# Altium PCB Pack_BMS_Module.PcbDoc
Units mm, origin at the board's own origin, x right, y up, seen from the top; angles counter-clockwise.
Board outline 100 x 100 mm, 2 copper layers (Top Layer, Bottom Layer); 94 components, 63 nets, 274 pads, 5 vias.
Unrouted connection lines stored in the file: 173.
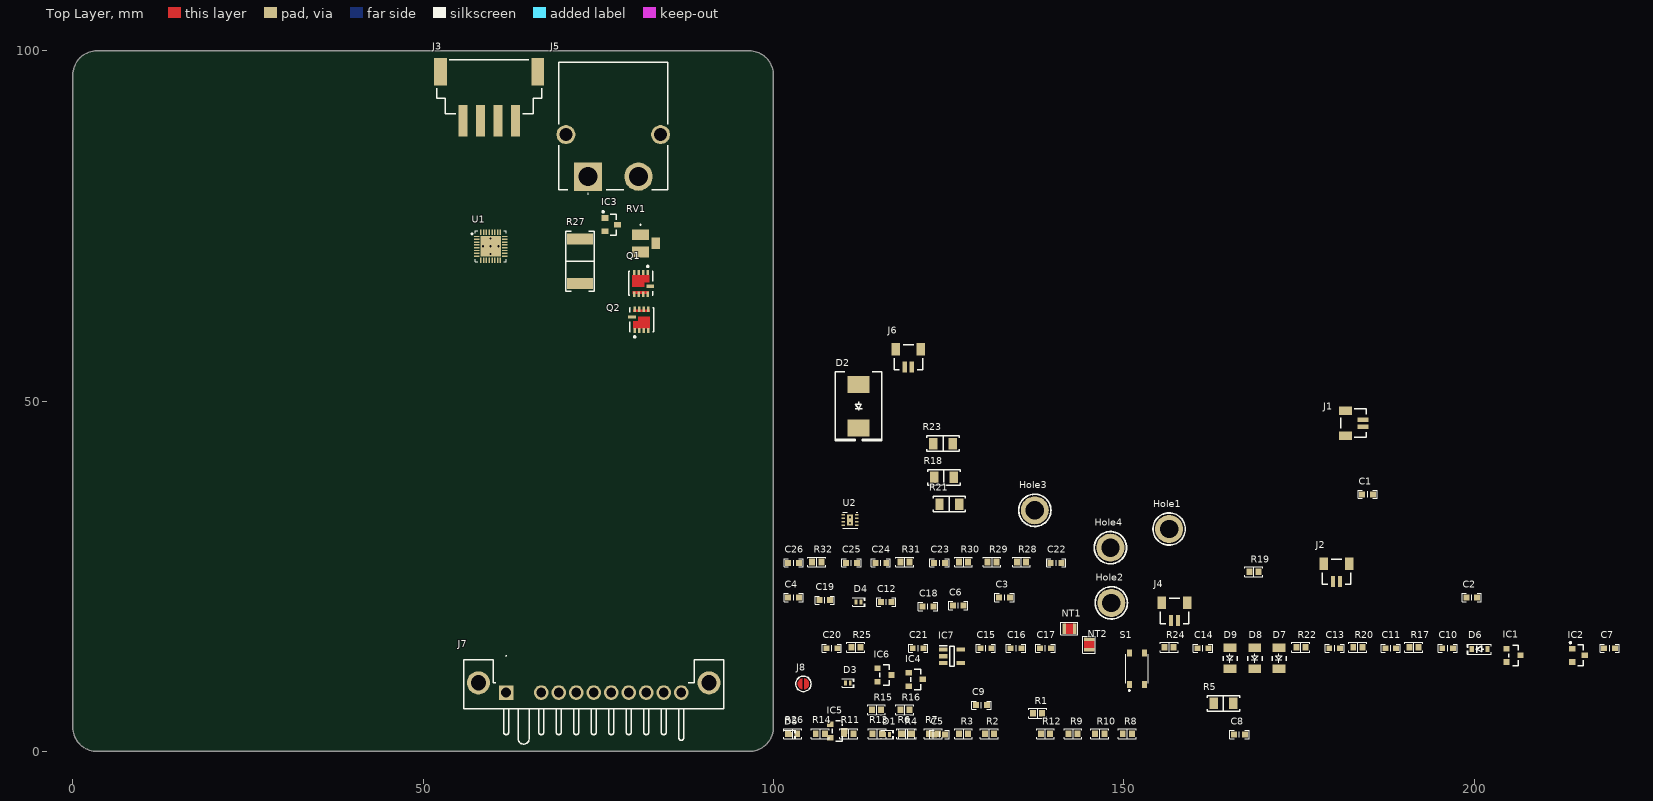
[diagram p0: Top Layer view]
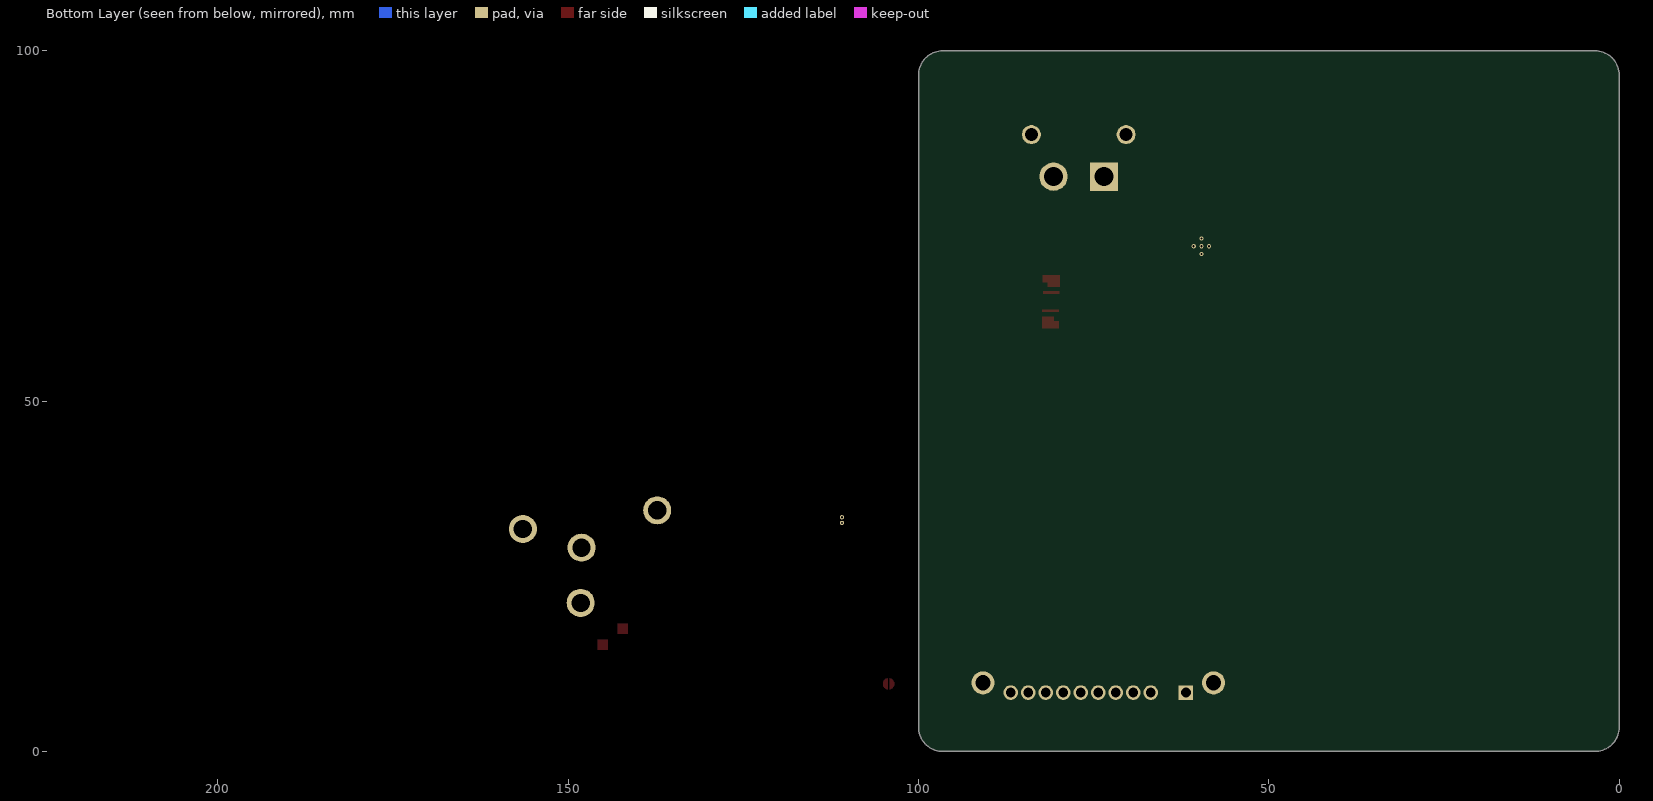
[diagram p1: Bottom Layer view, seen from below]

## Layer stack, top to bottom
Top Solder: solder mask 0.0102, Solder Resist, Dk 3.5
Top Layer: signal copper 0.0356
Dielectric 1: dielectric 0.32, FR-4, Dk 4.8
Bottom Layer: signal copper 0.0356
Bottom Solder: solder mask 0.0102, Solder Resist, Dk 3.5

## Board outline
0,3.479 0,96.521 cw(c3.479,96.521) 3.479,100 96.521,100 cw(c96.521,96.521) 100,96.521 100,3.479 cw(c96.521,3.479) 96.521,0 3.479,0 cw(c3.479,3.479)

## Design rules (kind name [scope] priority, off if disabled: settings)
BoardOutlineClearance [All] p1: gap=0.2 ignorepadtopadclearanceinfootprint=FALSE
Clearance "Stitching GND" [IsStitchingVia and InNet('GND') vs (IsVia and (Not IsStitchingVia)) Or IsPad] p1: gap=0.2 ignorepadtopadclearanceinfootprint=FALSE except(0.15: SMDPad-SMDPad; 0.28: Arc-Hole Track-Hole)
Clearance [All] p2: gap=0.2 ignorepadtopadclearanceinfootprint=FALSE except(0.15: SMDPad-SMDPad; 0.28: Arc-Hole Track-Hole)
HoleSize [All] p1: absolutevalues=TRUE maxlimit=6 minlimit=0.3 maxpercent=80.000 minpercent=20.000
HoleToHoleClearance HoleToHolePad [IsPad vs IsPad] p1: gap=0.45 allowstackedmicrovias=TRUE
HoleToHoleClearance HoleToHoleVia [IsVia vs IsVia] p2: gap=0.2 allowstackedmicrovias=TRUE
HoleToHoleClearance [All] p3: gap=0.3 allowstackedmicrovias=TRUE
MinimumAnnularRing MinimumViaAnnularRing [IsVia] p1: minimumring=0.15
MinimumAnnularRing [All] p2: minimumring=0.254
MinimumSolderMaskSliver [All] p1: minsoldermaskwidth=0.1
PlaneConnect [All] p1: planeconnectstyle=Relief reliefexpansion=0.508 reliefentries=4 reliefconductorwidth=0.32 reliefairgap=0.254
PolygonConnect MolexPwrGND [InNet('GND') vs IsPad And HasFootprint('43045-08YY_121314')] p1: connectstyle=Relief reliefconductorwidth=1 reliefentries=4 polygonreliefangle="90 Angle" conductorbypadedge=TRUE mindistance=0.381 enablemindistance=FALSE airgapwidth=0.35
PolygonConnect DRVTherrmalGND [InNet('GND') vs IsPad And HasFootprint('RXZ0016A-MFG')] p2: connectstyle=Direct reliefconductorwidth=0.254 reliefentries=4 polygonreliefangle="90 Angle" airgapwidth=0.254
PolygonConnect GNDStitchingDirect [InNet('GND')] p3: thpad.connectstyle=Relief thpad.reliefconductorwidth=0.32 thpad.reliefentries=4 thpad.polygonreliefangle="90 Angle" thpad.airgapwidth=0.254 thpad.conductorbypadedge=TRUE thpad.mindistance=0.381 thpad.enablemindistance=FALSE smdpad.connectstyle=Relief smdpad.reliefconductorwidth=0.32 smdpad.reliefentries=4 smdpad.polygonreliefangle="90 Angle" smdpad.airgapwidth=0.254 smdpad.conductorbypadedge=TRUE smdpad.mindistance=0.381 smdpad.enablemindistance=FALSE via.connectstyle=Direct via.reliefconductorwidth=0.254 via.reliefentries=4 via.polygonreliefangle="90 Angle" via.airgapwidth=0.254
PolygonConnect [All] p4: connectstyle=Relief reliefconductorwidth=0.32 reliefentries=4 polygonreliefangle="90 Angle" conductorbypadedge=TRUE mindistance=0.381 enablemindistance=FALSE airgapwidth=0.254
RoutingVias PowerVias [InNetClass('POWER') or InNet('GND')] p1: holewidth=0.5 width=0.8 viastyle="Through Hole" minholewidth=0.3 minwidth=0.6 maxholewidth=1.2 maxwidth=1.6
RoutingVias SignalVias [All] p2: holewidth=0.3 width=0.6 viastyle="Through Hole" minholewidth=0.3 minwidth=0.6 maxholewidth=0.5 maxwidth=0.8
SilkToSilkClearance [All] p1: silktosilkclearance=0.1
SilkToSolderMaskClearance [IsPad] p1: minsilkscreentomaskgap=0.1 clearancetoexposedcopper=TRUE
SolderMaskExpansion [All] p1: expansion=0.05 istentingtop=FALSE
SupplyNets "Schematic Supply Nets_5" [InNet('PACK+')] p1: voltage=12.60
SupplyNets "Schematic Supply Nets_4" [InNet('+3V3_LED')] p2: voltage=3.300
SupplyNets "Schematic Supply Nets_3" [InNet('GND')] p3: voltage=0.000
SupplyNets "Schematic Supply Nets_1" [InNet('PACK-')] p4: voltage=0.000
Width WidthPower [InNetClass('POWER') or InNet('GND')] p1: maxlimit=3 minlimit=0.2 preferedwidth=0.6
Width WidthSignal [All] p2: maxlimit=1 minlimit=0.2 preferedwidth=0.3
24 further rules are at their usual default settings.

## Classes and differential pairs
component class Pack_BMS_Module: Hole1 Hole2 Hole3 Hole4
net class TS[1..4]: TS1 TS2 TS3 TS4
component class SEC_PROT: C22 C23 C24 C25 C26 R28 R29 R30 R31 R32 U2
component class BATT_MGMT: C7 C8 C9 C10 C11 C12 C13 C14 C15 C16 C17 C18 C19 C20 C21 D6 D7 D8 D9 IC1 IC2 IC3 IC4 IC5 IC6 IC7 J8 NT1 NT2 Q1 Q2 R5 R6 R7 R8 R9 R10 R11 R12 R13 R15 R16 R17 R18 R19 R20 R21 R22 R23 R24 R25 R26 R27 RV1 S1 U1
component class BATT_CONN: C5 C6 D1 D2 D3 D4 D5 J7 R1 R2 R3 R4
component class CELL_CONN: C1 C2 C3 C4 J1 J2 J3 J4 J5 J6

## Components (designator, comment, footprint, x,y, rotation, side; value= is the part's Value field where it differs from the comment)
C1 "100nF" CAP_SMD_603 184.785,36.703 r0 top
C2 "100nF" CAP_SMD_603 199.644,21.971 r0 top
C3 "100nF" CAP_SMD_603 132.969,21.971 r0 top
C4 "100nF" CAP_SMD_603 102.87,21.971 r0 top
C5 "100nF" CAP_SMD_603 123.698,2.413 r0 top
C6 "100nF" CAP_SMD_603 126.365,20.828 r0 top
C7 "100nF" CAP_SMD_603 219.329,14.732 r0 top
C8 "100nF" CAP_SMD_603 166.497,2.413 r0 top
C9 "100nF" CAP_SMD_603 129.68,6.604 r0 top
C10 "1uF" CAP_SMD_603 196.215,14.732 r0 top
C11 "100nF" CAP_SMD_603 188.087,14.732 r0 top
C12 "1uF" CAP_SMD_603 116.091,21.336 r0 top
C13 "100nF" CAP_SMD_603 180.086,14.732 r0 top
C14 "100nF" CAP_SMD_603 161.29,14.732 r0 top
C15 "100nF" CAP_SMD_603 130.302,14.732 r0 top
C16 "1uF" CAP_SMD_603 134.62,14.732 r0 top
C17 "1uF" CAP_SMD_603 138.811,14.732 r0 top
C18 "100nF" CAP_SMD_603 122.047,20.701 r0 top
C19 "100nF" CAP_SMD_603 107.315,21.59 r0 top
C20 "100nF" CAP_SMD_603 108.331,14.732 r0 top
C21 "100nF" CAP_SMD_603 120.65,14.732 r0 top
C22 "100nF" CAP_SMD_603 140.335,26.924 r0 top
C23 "100nF" CAP_SMD_603 123.698,26.924 r0 top
C24 "470nF" CAP_SMD_603 115.316,26.924 r0 top
C25 "100nF" CAP_SMD_603 111.125,26.924 r0 top
C26 "100nF" CAP_SMD_603 102.87,26.924 r0 top
D1 "TPD1E10B06DPYR" 0402 116.205,2.413 r0 top
D2 "SMDJ13A" "DO214AB SMC" 112.141,49.276 r270 top
D3 "TPD1E10B06DPYR" 0402 110.617,9.779 r0 top
D4 "TPD1E10B06DPYR" 0402 112.141,21.336 r0 top
D5 "TPD1E10B06DPYR" 0402 102.235,2.413 r0 top
D6 "BAT54HT1G" "SOD323 IPC" 200.787,14.605 r0 top
D7 "LED" LED_1206 172.085,13.335 r90 top
D8 "LED" LED_1206 168.656,13.335 r90 top
D9 "LED" LED_1206 165.1,13.335 r90 top
Hole1 "Hole" hole_2.6 156.464,31.75 r0 top
Hole2 "Hole" hole_2.6 148.209,21.209 r0 top
Hole3 "Hole" hole_2.6 137.287,34.417 r0 top
Hole4 "Hole" hole_2.6 148.082,29.083 r0 top
IC1 "FDN358P" "ON SEMI SOT-23-3" 205.613,13.716 r0 top
IC2 "IRLML6344TRPBF" "INFINEON SOT-23-3" 214.884,13.716 r0 top
IC3 "IRLML6344TRPBF" "INFINEON SOT-23-3" 76.835,75.184 r0 top
IC4 "DMN1019USN-7" "DIODES SOT-23-3" 120.285,10.287 r0 top
IC5 "DMN1019USN-7" "DIODES SOT-23-3" 109.093,2.921 r0 top
IC6 "DMN1019USN-7" "DIODES SOT-23-3" 115.84,10.922 r0 top
IC7 "TPS70933DBVR" SOT95P280X145-5N 125.476,13.589 r0 top
J1 "BM02B-SRSS-TB(LF)(SN)" "JST BM02B-SRSS-TB" 182.888,46.855 r90 top
J2 "BM02B-SRSS-TB(LF)(SN)" "JST BM02B-SRSS-TB" 180.34,25.527 r0 top
J3 "S4B-XH-SM4-TB(LF)(SN)" "JST XH S4B-XH-SM4-TB" 59.436,94.742 r180 top
J4 "BM02B-SRSS-TB(LF)(SN)" "JST BM02B-SRSS-TB" 157.226,19.939 r0 top
J5 "XT60PW-M" XT60PWM 73.533,82.042 r0 top
J6 "BM02B-SRSS-TB(LF)(SN)" "JST BM02B-SRSS-TB" 119.245,56.126 r0 top
J7 "1746092-1" 17460921 61.849,8.4 r0 top
J8 "Jumper Pad" "Jumper Pad" 104.267,9.652 r0 top
NT1 "Net_Tie" Net_Tie_1.5mm 142.228,17.526 r0 top net-tie
NT2 "Net_Tie" Net_Tie_1.5mm 145.034,15.24 r90 top net-tie
Q1 "IQEH54NE2LM7UCG" IFX-PG-TTFN-9-1-V 81.269,66.806 r270 top
Q2 "IQEH54NE2LM7UCG" IFX-PG-TTFN-9-1-V 80.982,61.591 r90 top
R1 "100R" "RES 0603_1608" 137.694,5.461 r0 top
R2 "100R" "RES 0603_1608" 130.81,2.54 r0 top
R3 "47R" "RES 0603_1608" 127.127,2.54 r0 top
R4 "47R" "RES 0603_1608" 119.126,2.54 r0 top
R5 "300R" "RES 1206_3216" 164.211,6.858 r0 top
R6 "10M" "RES 0603_1608" 118.872,2.54 r0 top
R7 "10M" "RES 0603_1608" 122.809,2.54 r0 top
R8 "10M" "RES 0603_1608" 150.495,2.54 r0 top
R9 "10k" "RES 0603_1608" 142.748,2.54 r0 top
R10 "10k" "RES 0603_1608" 146.558,2.54 r0 top
R11 "5.1k" "RES 0603_1608" 110.744,2.54 r0 top
R12 "5.1k" "RES 0603_1608" 138.811,2.54 r0 top
R13 "5.1k" "RES 0603_1608" 114.808,2.54 r0 top
R14 "51k" "RES 0603_1608" 106.68,2.54 r0 top
R15 "1k" "RES 0603_1608" 114.707,5.969 r0 top
R16 "1k" "RES 0603_1608" 118.745,5.969 r0 top
R17 "1k" "RES 0603_1608" 191.389,14.859 r0 top
R18 "50R" "RES 1206_3216" 124.333,39.116 r0 top
R19 "100R" "RES 0603_1608" 168.555,25.654 r0 top
R20 "1k" "RES 0603_1608" 183.388,14.859 r0 top
R21 "50R" "RES 1206_3216" 125.095,35.306 r0 top
R22 "1k" "RES 0603_1608" 175.26,14.859 r0 top
R23 "50R" "RES 1206_3216" 124.206,43.942 r0 top
R24 "1k" "RES 0603_1608" 156.464,14.859 r0 top
R25 "100R" "RES 0603_1608" 111.76,14.859 r0 top
R26 "100R" "RES 0603_1608" 102.743,2.54 r0 top
R27 "1 mOhms" "RES 2512_6432" 72.39,69.977 r270 top
R28 "100R" "RES 0603_1608" 135.382,27.051 r0 top
R29 "1k" "RES 0603_1608" 131.191,27.051 r0 top
R30 "5.1R" "RES 0603_1608" 127.127,27.051 r0 top
R31 "1k" "RES 0603_1608" 118.745,27.051 r0 top
R32 "1k" "RES 0603_1608" 106.172,27.051 r0 top
RV1 "ITV4030L1215" ITV4030L1215 81.81,72.517 r180 top
S1 "PTS815_SJK_250_SMTR_LFS" PTS815SJK250SMTRLFS 151.892,11.811 r90 top
U1 "BQ41Z50RSNT" QFN32_RSN_TEX 59.636,72.095 r0 top
U2 "BQ296100DSGR" DSG0008A 110.932,33.024 r0 top

## Footprints (in the part's own frame and the unit in brackets; to place one, negate y for a bottom-side part, rotate by r counter-clockwise, add the part's x,y. Pads: shape width x height; smd on the part's side, far side on the other; paste and mask are expansions set on the pad)
0402 [mm] "SODFL, 2-Leads, Body 0.675x1.075mm, IPC Medium Density"
  rect 0.4x0.7 smd: 1(-0.35,0) 2(0.35,0)
  silkscreen extent -0.8,-0.63 0.92,0.63, body extent -0.51,-0.31 0.5,0.3, height 0.45
17460921 [mm]
  rect 2.1x2.1 hole 1.4: 1(0,0)
  round 2.1 hole 1.4: 2(5,0) 3(7.5,0) 4(10,0) 5(12.5,0) 6(15,0) 7(17.5,0) 8(20,0) 9(22.5,0) 10(25,0)
  round 3.3 hole 2.2: 11(-3.95,1.4) 12(28.95,1.4)
  silkscreen extent -6.05,-7.35 31.05,5.3, body extent -6.05,-7.35 31.05,4.7, height 4.79
CAP_SMD_603 [mm]
  rect 0.85x0.85 smd: 1(-0.775,0) 2(0.775,0)
  silkscreen extent -1.37,-0.59 1.37,0.59, body extent -0.8,-0.4 0.8,0.4, height 0.9
"DIODES SOT-23-3" [mm] "SOT23, 3-Leads, Body 2.90x2.40mm, Pitch 0.95mm, IPC Medium Density"
  rect 0.9x0.8 smd: 1(-1,0.95) 2(-1,-0.95) 3(1,0)
  silkscreen extent -0.7,-1.45 0.7,1.45, body extent -1.41,-1.45 1.41,1.45, height 1.5
"DO214AB SMC" [mm] "Molded Diode, 2-Leads, Body 6.85x5.90mm, IPC Medium Density"
  rect 2.45x3.15 smd: 1(-3.1,0) 2(3.1,0)
  silkscreen extent -4.9,-3.3 4.9,3.3, body extent -3.97,-2.95 3.97,2.95, height 2.6
DSG0008A [mm]
  rect 0.5x0.25 smd paste+0 mask+0.051: 1(-0.95,0.75) 2(-0.95,0.25) 3(-0.95,-0.25) 4(-0.95,-0.75) 5(0.95,-0.75) 6(0.95,-0.25) 7(0.95,0.25) 8(0.95,0.75)
  rect 0.9x1.6 smd paste-0.45 mask+0.051: 9(0,0)
  round 0.6 hole 0.3 paste-2539.97 mask+0.076: V(0,-0.4) V(0,0.4)
  silkscreen extent -1.07,-1.15 1.07,1.15, body extent -1,-1 1,1, height 0.77
hole_2.6 [mm] "2.6mm hole with exposed ring"
  round 4 hole 2.6: 1(0,0)
  silkscreen extent -2.3,-2.3 2.3,2.3
IFX-PG-TTFN-9-1-V [mm] "TTFN-9-1, 0.65 mm pitch, 9 pin, 3.30mm L X 3.30mm W X 1.10mm H body"
  rect 0.71x0.35 smd paste-0.35 mask+0: 1(-1.528,0.787) 1(-1.528,0.138) 1(-1.528,-1.162) 1(-1.528,-0.513)
  rect 0.8x0.35 smd paste-0.4 mask+0: 2(1.528,0.787) 2(1.528,0.138) 2(1.528,-1.162) 2(1.528,-0.513)
  rect 0.45x1.1 smd paste-0.55 mask+0: 3(0.423,1.162)
  Top Layer region: 0.477,-1.392 -1.172,-1.392 -1.172,1.017 -0.188,1.017 -0.188,0.288 0.477,0.288
  Top Layer region: 1.128,0.963 1.478,0.963 1.478,-1.337 1.128,-1.337
  silkscreen extent -2.55,-1.9 1.7,1.5, body extent -1.62,-1.84 1.68,1.46, height 1.11
"INFINEON SOT-23-3" [mm] "SOT23, 3-Leads, Body 2.90x2.40mm, Pitch 0.95mm, IPC Medium Density"
  rect 0.972x0.802 smd: 1(-0.885,0.95) 2(-0.885,-0.95) 3(0.885,0)
  silkscreen extent -1.27,-1.5 0.7,1.95, body extent -1.16,-1.45 1.16,1.45, height 1
ITV4030L1215 [mm]
  rect 2.4x1.55 smd: 1(0.775,-1.225) 3(0.775,1.225)
  rect 1.2x1.6 smd: 2(-1.375,0)
  silkscreen extent 0.75,-2.7 0.85,-2.6, body extent -2,-1.85 2,1.85, height 1
"JST BM02B-SRSS-TB" [mm] "1.0mm pitch/Disconnectable Crimp style connector"
  rect 0.6x1.55 smd: 1(-0.5,-1.262) 2(0.5,-1.262)
  rect 1.2x1.8 smd: M(-1.8,1.262) M(1.8,1.262)
  silkscreen extent -2.03,-1.68 2.03,1.91, body extent -2,-1.69 2,1.91, height 4.32
"JST XH S4B-XH-SM4-TB" [mm] "CONN HEADER SMD R/A 4POS 2.5MM"
  rect 1.3x4.5 smd: 1(-3.75,4.75) 2(-1.25,4.75) 3(1.25,4.75) 4(3.75,4.75)
  rect 1.8x3.9 smd: M(-6.95,-2.25) M(6.95,-2.25)
  silkscreen extent -7.5,-4 7.5,3.75, body extent -7.47,-4 7.48,6, height 6
"Jumper Pad" [mil]
  round 1 smd: 1(-18.48,0) 2(18.48,0)
  Top Layer region: 5.47,-31.02 5.47,31.02 18.81,25.26 28.15,14.14 31.5,0 28.15,-14.14 18.81,-25.26 5.47,-31.02
  Top Layer region: -5.47,-31.02 -18.81,-25.26 -28.15,-14.14 -31.5,0 -28.15,14.14 -18.81,25.26 -5.47,31.02 -5.47,31.02
  silkscreen extent -43,-43 43,43
LED_1206 [mm]
  rect 1.2x1.8 smd: 1(1.473,-0.051) 2(-1.549,-0.051)
  silkscreen extent -0.7,-1.09 0.6,0.94, body extent -1.57,-0.86 1.63,0.74, height 1.11
Net_Tie_1.5mm [mm] "Net Tie, via style. Full via, 0.3 hole, 0.6 diameter."
  rect 0.5x1.5 smd paste-2539.97 mask+0.102: 1(-0.75,0) 2(0.75,0)
  Top Layer region: -0.75,-0.75 0.75,-0.75 0.75,0.75 -0.75,0.75
  silkscreen extent -1.2,-0.9 1.2,0.9
"ON SEMI SOT-23-3" [mm] "SOT23, 3-Leads, Body 2.90x2.40mm, Pitch 0.95mm, IPC Medium Density"
  rect 0.9x0.8 smd: 1(-1,0.95) 2(-1,-0.95) 3(1,0)
  silkscreen extent -0.7,-1.45 0.7,1.45, body extent -1.16,-1.45 1.16,1.45, height 1
PTS815SJK250SMTRLFS [mm]
  rect 1x0.7 smd: 1(-2.25,1.075) 1(2.25,1.075) 2(-2.25,-1.075) 2(2.25,-1.075)
  silkscreen extent -3.2,-1.6 2.07,1.6, body extent -2.3,-1.6 2.3,1.6, height 2.5
QFN32_RSN_TEX [mil]
  rect 29.81x8.03 smd: 1(-78.41,55.12) 2(-78.41,39.38) 3(-78.41,23.62) 4(-78.41,7.88) 5(-78.41,-7.88) 6(-78.41,-23.62) 7(-78.41,-39.38) 8(-78.41,-55.12) 17(78.41,-55.12) 18(78.41,-39.38) 19(78.41,-23.62) 20(78.41,-7.88) 21(78.41,7.88) 22(78.41,23.62) 23(78.41,39.38) 24(78.41,55.12)
  rect 8.03x29.81 smd: 9(-55.12,-78.41) 10(-39.38,-78.41) 11(-23.62,-78.41) 12(-7.88,-78.41) 13(7.88,-78.41) 14(23.62,-78.41) 15(39.38,-78.41) 16(55.12,-78.41) 25(55.12,78.41) 26(39.38,78.41) 27(23.62,78.41) 28(7.88,78.41) 29(-7.88,78.41) 30(-23.62,78.41) 31(-39.38,78.41) 32(-55.12,78.41)
  rect 114x114 smd: 33(0,0)
  silkscreen extent -109,-86 86,86, body extent -79,-79 79,79, height 31
"RES 0603_1608" [mm] "Chip Resistor, 2-Leads, Body 1.60x0.80mm, IPC Medium Density"
  rect 0.85x0.95 smd: 1(-0.65,0) 2(0.65,0)
  silkscreen extent -1.27,-0.7 1.27,0.7, body extent -0.8,-0.4 0.8,0.4, height 0.45
"RES 1206_3216" [mm] "Chip Resistor, 2-Leads, Body 3.13x1.55mm, IPC Medium Density"
  rect 1.2x1.65 smd: 1(-1.4,0) 2(1.4,0)
  silkscreen extent -2.3,-1.1 2.3,1.1, body extent -1.6,-0.8 1.6,0.8, height 0.6
"RES 2512_6432" [mm] "Chip Resistor, 2-Leads, Body 6.30x3.15mm, IPC Medium Density"
  rect 1.6x3.65 smd: 1(-3.175,0) 2(3.175,0)
  silkscreen extent -4.3,-2.05 4.3,2.05, body extent -3.15,-1.57 3.15,1.57, height 0.7
"SOD323 IPC" [mm] "SOD, 2-Leads, Body 1.25x2.50mm, IPC Medium Density"
  rect 0.625x0.83 smd: 1(-1.112,0) 2(1.112,0)
  silkscreen extent -1.78,-0.7 1.68,0.7, body extent -1.36,-0.62 1.36,0.63, height 1.05
SOT95P280X145-5N [mm]
  rect 1.2x0.6 smd: 1(-1.25,0.95) 2(-1.25,0) 3(-1.25,-0.95) 4(1.25,-0.95) 5(1.25,0.95)
  silkscreen extent -1.85,-1.45 0.3,1.5, body extent -1.4,-1.45 1.4,1.45, height 1.2
XT60PWM [mm]
  rect 4.05x4.05 hole 2.7: 1(0,0)
  round 4.05 hole 2.7: 2(7.2,0)
  round 2.7 hole 1.8: 3(-3.15,6) 3(10.35,6)
  silkscreen extent -4.15,-2.5 11.35,16.35, body extent -4.35,-1.82 11.55,16.38, height 8.61

## Part data
C1 C2 C3 C4 C5 C6 C7 C8 C9 C10 C11 C12 C13 C14 C15 C16 C17 C18 C19 C20 C21 C22 C23 C24 C25 C26: library part "Non-polar Capacitor", "Generic Ceramic Capacitor", Voltage=25V
D1 D3 D4 D5: "TVS DIODE 5.5VWM 14VC 2X1SON", Current - Peak Pulse (10/1000µs)="5A (8/20µs)", Device Package="0402 (1005 Metric)", Manufacturer="Texas Instruments", Operating Temperature="-40°C ~ 125°C (TA)", Power - Peak Pulse=90W, Power Line Protection=No, Supplier Device Package="2-X1SON (1x.60)", Supplier Part Number 1=296-30406-1-ND, Voltage - Breakdown (Min)=6V, Voltage - Clamping (Max) @ Ipp=14V, Voltage - Reverse Standoff (Typ)="5.5V (Max)", Applications="General Purpose", Bidirectional Channels=1, ComponentLink1Description=Datasheet, ComponentLink1URL=http://www.ti.com/general/docs/suppproductinfo.tsp?distId=10&gotoUrl=http%3A%2F%2Fwww.ti.com%2Flit%2Fgpn%2Ftpd1e10b06, ComponentLink2Description="DigiKey Link", ComponentLink2URL=https://www.digikey.com/en/products/detail/texas-instruments/TPD1E10B06DPYR/3197744, LastUpdated="6/3/2024 8:23:00 PM", Lifecycle Status=Active, Minimum Order=1, Mounting Type="Surface Mount", Package / Case="0402 (1005 Metric)", Packaging=TapeAndReel, Part Number=TPD1E10B06DPYR, Part Status=Active, PartId=10446, Price=0.06, Series=-, Supplier 1=DigiKey, Type=Zener
D2: "TVS DIODE 13VWM 21.5VC DO214AB", Current - Peak Pulse (10/1000µs)=139.5A, Manufacturer="Littelfuse Inc.", Operating Temperature="-65°C ~ 150°C (TJ)", Package / Case="DO-214AB, SMC", Power - Peak Pulse="3000W (3kW)", Power Line Protection=No, Supplier Device Package="DO-214AB (SMCJ)", Supplier Part Number 1=SMDJ13ACT-ND, Voltage - Breakdown (Min)=14.4V, Voltage - Clamping (Max) @ Ipp=21.5V, Voltage - Reverse Standoff (Typ)=13V, Applications="General Purpose", ComponentLink1Description=Datasheet, ComponentLink1URL=https://www.littelfuse.com/~/media/electronics/datasheets/tvs_diodes/littelfuse_tvs_diode_smdj_datasheet.pdf.pdf, ComponentLink2Description="DigiKey Link", ComponentLink2URL=https://www.digikey.com/en/products/detail/littelfuse-inc/SMDJ13A/2024476, LastUpdated="6/3/2024 7:57:02 PM", Lifecycle Status=Active, Minimum Order=1, Mounting Type="Surface Mount", Packaging=TapeAndReel, Part Number=SMDJ13A, Part Status=Active, PartId=6478, Price=0.33, Series=SMDJ, Supplier 1=DigiKey, Type=Zener, Unidirectional Channels=1
D6: "DIODE SCHOTTKY 30V 200MA SOD323", Capacitance @ Vr, F="10pF @ 1V, 1MHz", Current - Average Rectified (Io)="200mA (DC)", Current - Reverse Leakage @ Vr="2µA @ 25V", Manufacturer="ON Semiconductor", Operating Temperature - Junction="-55°C ~ 150°C", Package / Case="SC-76, SOD-323", Supplier Device Package=SOD-323, Supplier Part Number 1=BAT54HT1GOSCT-ND, Voltage - DC Reverse (Vr) (Max)=30V, Voltage - Forward (Vf) (Max) @ If="800mV @ 100mA", ComponentLink1Description=Datasheet, ComponentLink1URL=//media.digikey.com/pdf/Data%20Sheets/Fairchild%20PDFs/BAT54HT1G_Rev_1.2.pdf, ComponentLink2Description="DigiKey Link", ComponentLink2URL=http://digikey.com/product-detail/en/on-semiconductor/BAT54HT1G/BAT54HT1GOSCT-ND/917809, Diode Type=Schottky, LastUpdated="10/27/2025 1:55:15 PM", Lifecycle Status=Active, Minimum Order=1, Mounting Type="Surface Mount", Packaging=TapeAndReel, Part Number=BAT54HT1G, Part Status=Active, PartId=3080, Price=0.03, Reverse Recovery Time (trr)=5ns, Speed="Small Signal =< 200mA (Io), Any Speed", Supplier 1=DigiKey
D7 D8 D9: "Indicator LED", Color=Blue
IC1: "MOSFET P-CH 30V 1.5A SSOT3", Current - Continuous Drain (Id) @ 25°C="1.5A (Ta)", Drain to Source Voltage (Vdss)=30V, Drive Voltage (Max Rds On,  Min Rds On)="4.5V, 10V", Input Capacitance (Ciss) (Max) @ Vds="182pF @ 15V", Manufacturer="ON Semiconductor", Operating Temperature="-55°C ~ 150°C (TJ)", Package / Case="TO-236-3, SC-59, SOT-23-3", Power Dissipation (Max)="500mW (Ta)", Supplier Device Package=SuperSOT-3, Supplier Part Number 1=FDN358PCT-ND, ComponentLink1Description=Datasheet, ComponentLink1URL=https://www.onsemi.com/pub/Collateral/FDN358P-D.PDF, ComponentLink2Description="DigiKey Link", ComponentLink2URL=http://digikey.com/product-detail/en/on-semiconductor/FDN358P/FDN358PCT-ND/965606, FET Type=P-Channel, Gate Charge (Qg) (Max) @ Vgs="5.6nC @ 10V", LastUpdated="6/3/2024 8:15:27 PM", Lifecycle Status=Active, Minimum Order=1, Mounting Type="Surface Mount", Packaging=TapeAndReel, Part Number=FDN358P, Part Status=Active, Price=0.11, Rds On (Max) @ Id, Vgs="125mOhm @ 1.5A, 10V", Series=PowerTrench®, Supplier 1=DigiKey, Technology="MOSFET (Metal Oxide)", Vgs (Max)=±20V, Vgs(th) (Max) @ Id="3V @ 250µA"
IC2 IC3: "MOSFET N-CH 30V 5A MICRO3/SOT23", Current - Continuous Drain (Id) @ 25°C="5A (Ta)", Drain to Source Voltage (Vdss)="30 V", Drive Voltage (Max Rds On,  Min Rds On)="2.5V, 4.5V", Input Capacitance (Ciss) (Max) @ Vds="650 pF @ 25 V", Manufacturer="Infineon Technologies", Operating Temperature="-55°C ~ 150°C (TJ)", Package / Case="TO-236-3, SC-59, SOT-23-3", Power Dissipation (Max)="1.3W (Ta)", Supplier Device Package=Micro3™/SOT-23, Supplier Part Number 1=IRLML6344TRPBFCT-ND, ComponentLink1Description=Datasheet, ComponentLink1URL=https://www.infineon.com/dgdl/irlml6344pbf.pdf?fileId=5546d462533600a4015356689c44262c, ComponentLink2Description="DigiKey Link", ComponentLink2URL=https://www.digikey.com/en/products/detail/infineon-technologies/IRLML6344TRPBF/2538152, FET Type=N-Channel, Gate Charge (Qg) (Max) @ Vgs="6.8 nC @ 4.5 V", LastUpdated="6/3/2024 8:15:23 PM", Lifecycle Status=Active, Minimum Order=1, Mounting Type="Surface Mount", Packaging=TapeAndReel, Part Number=IRLML6344TRPBF, Part Status=Active, Price=0.10, Rds On (Max) @ Id, Vgs="29mOhm @ 5A, 4.5V", Series=HEXFET®, Supplier 1=DigiKey, Technology="MOSFET (Metal Oxide)", Vgs (Max)=±12V, Vgs(th) (Max) @ Id="1.1V @ 10µA"
IC4 IC5 IC6: "MOSFET N-CH 12V 9.3A SC59", Current - Continuous Drain (Id) @ 25°C="9.3A (Ta)", Drain to Source Voltage (Vdss)="12 V", Drive Voltage (Max Rds On,  Min Rds On)="1.2V, 2.5V", Input Capacitance (Ciss) (Max) @ Vds="2426 pF @ 10 V", Manufacturer="Diodes Incorporated", Operating Temperature="-55°C ~ 150°C (TJ)", Package / Case="TO-236-3, SC-59, SOT-23-3", Power Dissipation (Max)="680mW (Ta)", Supplier Device Package=SC-59-3, Supplier Part Number 1=DMN1019USN-7DICT-ND, ComponentLink1Description=Datasheet, ComponentLink1URL=https://www.diodes.com/assets/Datasheets/DMN1019USN.pdf, ComponentLink2Description="DigiKey Link", ComponentLink2URL=https://www.digikey.com/en/products/detail/diodes-incorporated/DMN1019USN-7/4898853, FET Type=N-Channel, Gate Charge (Qg) (Max) @ Vgs="50.6 nC @ 8 V", LastUpdated="6/3/2024 8:15:16 PM", Lifecycle Status=Active, Minimum Order=1, Mounting Type="Surface Mount", Packaging=TapeAndReel, Part Number=DMN1019USN-7, Part Status=Active, Price=0.10, Rds On (Max) @ Id, Vgs="10mOhm @ 9.7A, 4.5V", Series=-, Supplier 1=DigiKey, Technology="MOSFET (Metal Oxide)", Vgs (Max)=±8V, Vgs(th) (Max) @ Id="800mV @ 250µA"
IC7: "Integrated Circuit", Manufacturer_Name="Texas Instruments", Mouser Part Number=595-TPS70933DBVR, Arrow Part Number=TPS70933DBVR, Arrow Price/Stock=https://www.arrow.com/en/products/tps70933dbvr/texas-instruments?region=nac, Datasheet Link=http://www.ti.com/lit/gpn/tps709, Height=1.45mm, Manufacturer_Part_Number=TPS70933DBVR, Mouser Price/Stock=https://www.mouser.co.uk/ProductDetail/Texas-Instruments/TPS70933DBVR?qs=Z9twEOuL%252B%2FJOaGO60BtvLA%3D%3D
J1 J2 J4 J6: "CONN HEADER SMD 2POS 1MM", Current Rating (Amps)=0.7A, Insulation Color=Natural, Manufacturer="JST Sales America Inc.", Material Flammability Rating="UL94 V-0", Operating Temperature="-25°C ~ 85°C", Supplier Part Number 1=455-1788-1-ND, Voltage Rating=50V, ComponentLink1Description=Datasheet, ComponentLink1URL=http://www.jst-mfg.com/product/pdf/eng/eSR.pdf, ComponentLink2Description="DigiKey Link", ComponentLink2URL=http://digikey.com/product-detail/en/jst-sales-america-inc/BM02B-SRSS-TB-LF-SN/455-1788-1-ND/926859, Connector Type=Header, Contact Finish - Mating=Tin, Contact Finish - Post=Tin, Contact Material="Copper Alloy", Contact Shape=Square, Contact Type="Male Pin", Fastening Type=Push-Pull, Features="Solder Retention", Insulation Height="0.167\" (4.25mm)", Insulation Material="Polyamide (PA), Nylon", LastUpdated="1/12/2020 10:11:04 PM", Lifecycle Status=Active, Minimum Order=1, Mounting Type="Surface Mount", Number of Positions=2, Number of Positions Loaded=All, Number of Rows=1, Packaging=TapeAndReel, Part Number=BM02B-SRSS-TB(LF)(SN), Part Status=Active, PartId=12, Pitch - Mating="0.039\" (1.00mm)", Price=0.22, Series=SR, Shrouding="Shrouded - 4 Wall", Style="Board to Cable/Wire", Supplier 1=DigiKey, Termination=Solder
J3: "CONN HEADER SMD R/A 4POS 2.5MM", Current Rating (Amps)=3A, Insulation Color=Natural, Manufacturer="JST Sales America Inc.", Material Flammability Rating="UL94 V-0", Operating Temperature="-25°C ~ 85°C", Supplier Part Number 1=455-2262-1-ND, ComponentLink1Description=Datasheet, ComponentLink1URL=http://www.jst-mfg.com/product/pdf/eng/eXH.pdf, ComponentLink2Description="DigiKey Link", ComponentLink2URL=http://digikey.com/product-detail/en/jst-sales-america-inc/S4B-XH-SM4-TB-LF-SN/455-2262-1-ND/1651060, Connector Type=Header, Contact Finish - Mating=Tin, Contact Finish - Post=Tin, Contact Material="Copper Alloy", Contact Shape=Square, Contact Type="Male Pin", Fastening Type="Detent Lock", Features="Solder Retention", Insulation Height="0.236\" (6.00mm)", Insulation Material="Polyamide (PA6T), Nylon 6T", LastUpdated="8/29/2025 7:06:32 AM", Lifecycle Status=Active, Minimum Order=1, Mounting Type="Surface Mount, Right Angle", Number of Positions=4, Number of Positions Loaded=All, Number of Rows=1, Packaging=TapeAndReel, Part Number=S4B-XH-SM4-TB(LF)(SN), Part Status=Active, PartId=191, Pitch - Mating="0.098\" (2.50mm)", Price=0.49, Row Spacing - Mating="-25°C ~ 85°C", Series=XH, Shrouding="Shrouded - 4 Wall", Style="Board to Cable/Wire", Supplier 1=DigiKey, Termination=Solder
J5: "Connector", Manufacturer_Name=Amass, Datasheet Link=https://www.tme.eu/Document/b13629717d44ae038681dba08d18c0b6/XT60PW-M.pdf, Height=8.4mm, Manufacturer_Part_Number=XT60PW-M
J7: "Connector", Manufacturer_Name="TE Connectivity", Mouser Part Number=571-1746092-1, Datasheet Link=https://www.te.com/commerce/DocumentDelivery/DDEController?Action=srchrtrv&DocNm=1746092&DocType=Customer%20Drawing&DocLang=English&DocFormat=pdf&PartCntxt=1746092-1, Height=4.95mm, Manufacturer_Part_Number=1746092-1, Mouser Price/Stock=https://www.mouser.co.uk/ProductDetail/TE-Connectivity/1746092-1?qs=wds1f20rnm3OmhXYRwBIWg%3D%3D
NT1 NT2: "Net Tie"
Q1 Q2: "Insulated-Gate Field-Effect Transistor (IGFET), N-Channel, Enhancement, Body Diode, Pin 1 Source, 2 Source, 3 Source, 4 Sourse, 5 Drain, 6 Drain, 7 Drain, 8 Drain, 9 Gate, 9 Pins", Manufacturer="Infineon Technologies", Package Reference=PG-TTFN-9-3, Manufacturer Order Number=IQEH54NE2LM7UCG
R1 R2 R3 R4 R6 R7 R8 R9 R10 R11 R12 R13 R14 R15 R16 R17 R19 R20 R22 R24 R25 R26 R28 R29 R30 R31 R32: library part Resistor, "Generic Resistor", Power=1/8W
R5 R18 R21 R23: library part Resistor, "Generic Resistor", Power=1W
R27: library part TLR3A20DR001FTDG, "RES 0.001 OHM 1% 2W 2512", Device Package="2512 (6432 Metric)", Manufacturer="TE Connectivity Passive Product", Operating Temperature="-55°C ~ 170°C", Power (Watts)=2W, Supplier Device Package=2512, Supplier Part Number 1=A129565CT-ND, Temperature Coefficient=±50ppm/°C, Tolerance=±1%, ComponentLink1Description=Datasheet, ComponentLink1URL=https://www.te.com/commerce/DocumentDelivery/DDEController?Action=srchrtrv&DocNm=1773449-3&DocType=DS&DocLang=English, ComponentLink2Description="DigiKey Link", ComponentLink2URL=http://digikey.com/product-detail/en/te-connectivity-passive-product/TLR3A20DR001FTDG/A129565CT-ND/8566769, Composition="Metal Foil", Features="Current Sense", Height - Seated (Max)="0.024\" (0.60mm)", LastUpdated="9/2/2020 1:27:06 AM", Lifecycle Status=Active, Minimum Order=1, Number of Terminations=2, Package / Case="2512 (6432 Metric)", Packaging=TapeAndReel, Part Number=TLR3A20DR001FTDG, Part Status=Active, Price=0.30, Resistance="1 mOhms", Series="TLR, CGS", Size / Dimension="0.252\" L x 0.126\" W (6.40mm x 3.20mm)", Supplier 1=DigiKey
RV1: "Varistor", Manufacturer_Name=LITTELFUSE, Datasheet Link=https://www.littelfuse.com/~/media/electronics/product_specifications/resettable_ptcs/littelfuse_battery_protectors_itv4030l1412_product_specification.pdf.pdf, Height=0.9mm, Manufacturer_Part_Number=ITV4030L1215
S1: "Switch", Arrow Part Number="PTS815 SJK 250 SMTR LFS", Manufacturer_Name="C & K COMPONENTS", Mouser Part Number=611-PTS815SJK250SMTR, Arrow Price/Stock=https://www.arrow.com/en/products/pts815-sjk-250-smtr-lfs/ck, Datasheet Link=https://www.mouser.com/datasheet/2/60/pts815-1535658.pdf, Height=2mm, Manufacturer_Part_Number="PTS815 SJK 250 SMTR LFS", Mouser Price/Stock=https://www.mouser.co.uk/ProductDetail/CK/PTS815-SJK-250-SMTR-LFS?qs=ahcBuItHZ3yETpGYMHf%2FgQ%3D%3D
U1: "2 to 4 series Li-ion highly integrated battery fuel gauge and protector 32-QFN -40 to 85", Manufacturer_Name="Texas Instruments", Copyright="Copyright (C) 2025 Ultra Librarian. All rights reserved.", Manufacturer_Part_Number=BQ41Z50RSNT, RefDes=RefDes, Type=Type
U2: "2-4S Overvoltage Protector with LDO Output 8-WSON -40 to 110", Alternate_PartNumber=BQ296103DSGT, Manufacturer="Texas Instruments", PartNumber=BQ296103DSGR, CompType=IC, Copyright="Copyright (C) 2025 Ultra Librarian. All rights reserved.", Manufacturer_Name="Texas Instruments", Manufacturer_Part_Number=BQ296100DSGR, MountType=SMT, PackageReference=DSG0008A, RefDes=RefDes, RoHS=Y, SymbolVerison=2014-11-19, Type=TYPE

## Via types
v1: diameter 0.6, hole 0.3, Top Layer to Bottom Layer, 5 vias

## Nets (pads, with @x,y where several pads share a name; then routed paths per layer and width w, separated by ;. In a path a pad name is that pad's centre, name@x,y a point inside that pad or via, vN(x,y) a via of type N, cw(c..) or ccw(c..) an arc to the next point about the centre after c; other vN are vias at no path point)
+3V3_LED: C18.1 D7.1 D8.1 D9.1 IC7.5
ALERT_PR: D3.2 J7.7 R2.2
GND: C1.2 C2.2 C3.2 C4.2 C10.2 C12.2 C16.2 C17.2 C22.1 C24.2 C26.1 J1.2 J2.2 J4.2 J6.2 NT1.1 NT2.1 S1.2 U1.11 U1.33 U2.6 U2.9
  other v1: 59.636,70.995 58.536,72.095 59.636,72.095 60.736,72.095 59.636,73.196
LED_A: D9.2 U1.3
LED_B: D8.2 U1.4
LED_C: D7.2 U1.8
NetC5_1: C5.1 C6.2
NetC7_1: C7.1 C8.2
NetC7_2: C7.2 Q1.1 R5.2 R6.2 RV1.3
NetC9_1: C9.1 IC3.1 J8.1 R14.2
NetC10_1: C10.1 D6.1 U1.18
NetC11_1: C11.1 C13.2 IC4.1 R20.2 U1.21
NetC11_2: C11.2 R17.2 U1.19 U1.20
NetC12_1: C12.1 R19.1 U1.14
NetC13_1: C13.1 C14.2 IC5.1 R22.2 U1.22
NetC14_1: C14.1 IC6.1 R24.2 U1.23
NetC15_1: C15.1 C21.1 R26.2 U1.25
NetC15_2: C15.2 C20.1 R25.2 U1.24
NetC16_1: C16.1 U1.31
NetC17_1: C17.1 U1.30
NetC22_2: C22.2 R28.2 U2.1
NetC23_1: C23.1 C25.2 R31.2 U2.4
NetC23_2: C23.2 R29.2 U2.2 U2.3
NetC24_1: C24.1 R30.2
NetC25_1: C25.1 C26.2 R32.2 U2.5
NetD6_2: D6.2 J3.1 R17.1 R18.2 R28.1 R29.1
NetIC1_1: IC1.1 R7.1 R12.2
NetIC1_2: IC1.2 Q1.2 Q2.2 R7.2 R19.2
NetIC1_3: IC1.3 R5.1
NetIC2_1: IC2.1 R9.2
NetIC2_3: IC2.3 Q2.3 R8.1 R13.2
NetIC3_3: IC3.3 RV1.2
NetIC4_2: IC4.2 J3.2 R20.1 R21.2 R31.1
NetIC4_3: IC4.3 R18.1
NetIC5_2: IC5.2 J3.3 R22.1 R23.2 R32.1
NetIC5_3: IC5.3 R21.1
NetIC6_2: IC6.2 J3.4 NT1.2 NT2.2 R24.1
NetIC6_3: IC6.3 R23.1
NetJ8_2: J8.2 R15.2 R16.1
NetQ1_3: Q1.3 R6.1 R11.2
NetR1_1: R1.1 U1.7
NetR2_1: R2.1 U1.5
NetR3_1: R3.1 U1.1
NetR4_1: R4.1 U1.2
NetR10_1: R10.1 U1.15
NetR11_1: R11.1 U1.17
NetR12_1: R12.1 U1.13
NetR13_1: R13.1 U1.16
NetR15_1: R15.1 U2.8
NetR16_2: R16.2 U1.12
NetR30_1: R30.1 U2.7
NetS1_1: S1.1 U1.32
PACK+: C5.2 C8.1 D2.2 IC2.2 J7.8 J7.9 J7.10 Q2.1 R8.2 R10.2
PACK-: C6.1 C18.2 C19.2 C21.2 D1.1 D2.1 D3.1 D4.1 D5.1 IC7.2 J7.1 J7.2 J7.3 R9.1 R26.1 R27.2
PPW_N: C9.2 C20.2 IC3.2 J5.1 R14.1 R25.1 R27.1
PPW_P: C19.1 IC7.1 J5.2 RV1.1
PRES_PR: D1.2 J7.4 R1.2
SMBC_PR: D5.2 J7.5 R4.2
SMBD_PR: D4.2 J7.6 R3.2
TS1: C1.1 J1.1 U1.26
TS2: C2.1 J2.1 U1.27
TS3: C3.1 J4.1 U1.28
TS4: C4.1 J6.1 U1.29
pads on no net: Hole1.1 Hole2.1 Hole3.1 Hole4.1 IC7.3 IC7.4 J1.M J2.M J3.M J4.M J5.3 J6.M J7.11 J7.12 U1.6 U1.9 U1.10 U2.V

## Silkscreen, mask and mechanical layers (free items; w line width, h text height)
Mechanical 1:
  the board outline again, w0.254